# EAGLE board tarocco (EAGLE 7.3.0)
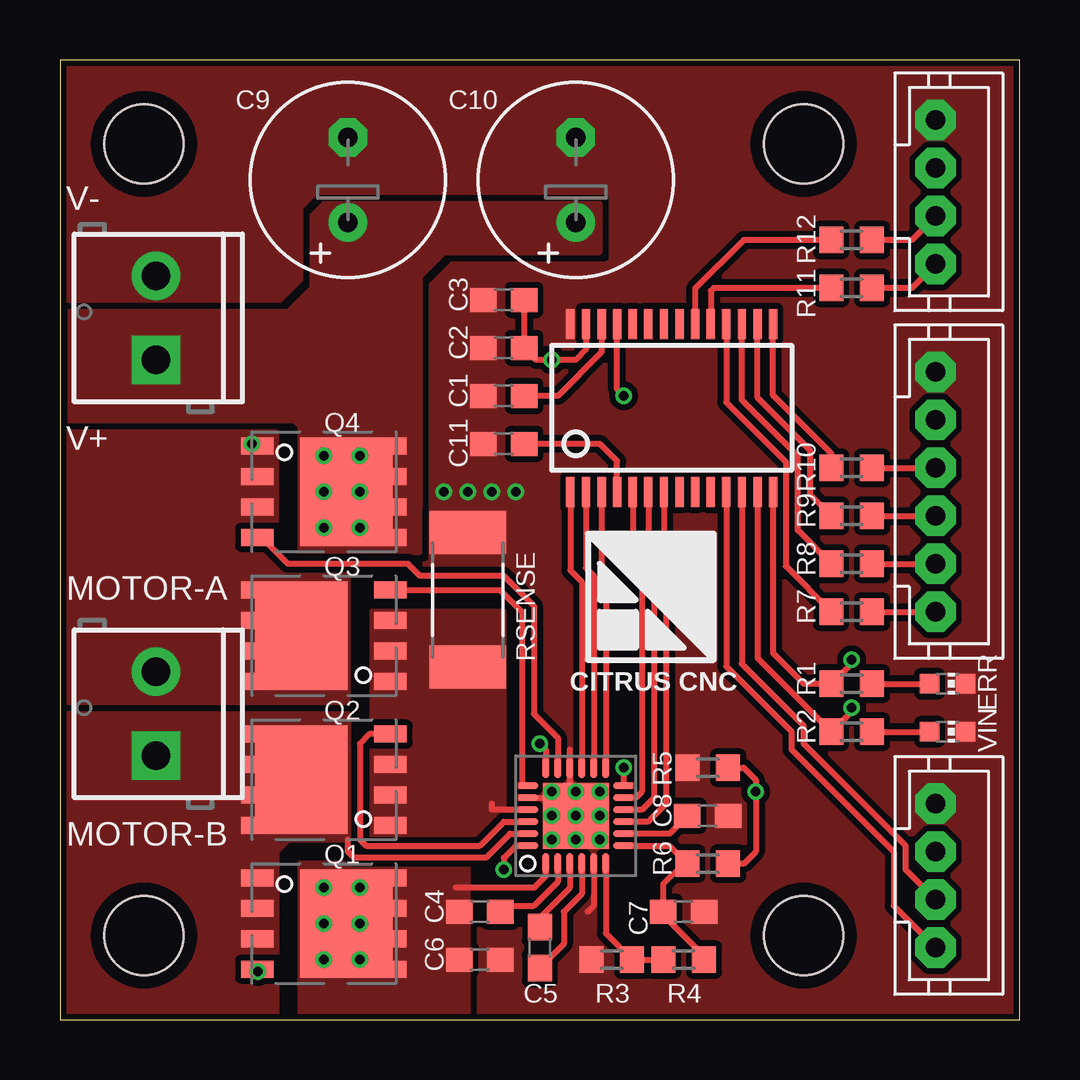
[diagram p0: board, top side]
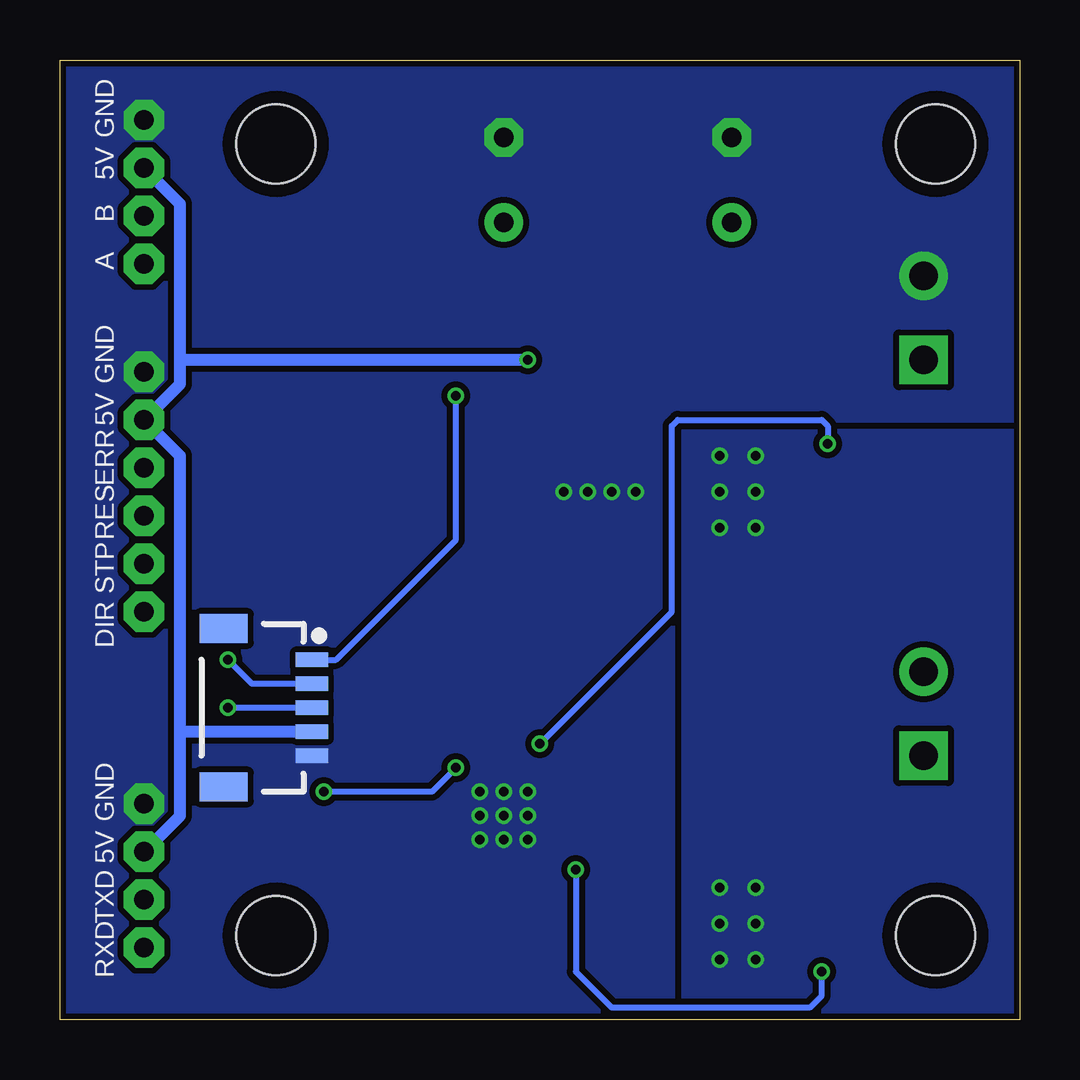
[diagram p1: board, bottom side, seen from below]

Size 40 x 40 mm. Coordinates in mm from the lower left corner, seen from the top.
Outline: 0,0 40,0 40,40 0,40 0,0
Copper layers (1*16): Top 0.035mm / dielectric 1.5mm / Bottom 0.035mm
Design rules "MF_Standard_2_Layer": minimum track width 5mil, minimum drill 12mil, track to track 5mil, track to pad 5mil, pad to pad 5mil, via to via 5mil, smd to smd 0mil, copper to edge 10mil, drill to drill 10mil, minimum pad ring 6mil, minimum via ring 6mil, stop-mask expansion 2mil, vias tented up to drill 25mil, thermal gap 10mil

## Footprints (pad centres in the part's own frame; a part is rotated, then mirrored left to right if it is on the bottom)
VQFN24 = smd 0.28 x 0.85: AVDD -1.25,-1.975; DVDD -0.75,-1.975; FAULT -0.25,-1.975; GH2 -1.25,1.975; GL1 1.25,1.975; GL2 -0.25,1.975; IDRIVE 1.25,-1.975; SENSE 0.25,-1.975; SH2 -0.75,1.975; SN 0.75,1.975; SO 0.75,-1.975; SP 0.25,1.975 | smd 0.85 x 0.28: CPH -1.975,0.25; CPL -1.975,-0.25; EN 1.975,-0.75; GH1 1.975,0.75; GND@1 1.975,0.25; GND@2 -1.975,-0.75; PH 1.975,-0.25; SH1 1.975,1.25; SLEEP 1.975,-1.25; VCP -1.975,0.75; VM -1.975,1.25; VREF -1.975,-1.25 | smd 2.75 x 2.75: GND@3 0,0
C0603 = smd 1.1 x 1: 1 -0.85,0; 2 0.85,0
E3,5-8 = drill 0.813 pad 1.6: + -1.778,0 | drill 0.813 pad 1.6 octagon: - 1.778,0
JST-PH6 = drill 0.813 pad 1.676 octagon: 1 5,0; 2 3,0; 3 1,0; 4 -1,0; 5 -3,0; 6 -5,0
JST-PH4 = drill 0.813 pad 1.676 octagon: 1 3,0; 2 1,0; 3 -1,0; 4 -3,0
CHIP-LED0603 = smd 0.8 x 0.8: A 0,-0.75; C 0,0.75
SSOP28 = smd 0.35 x 1.25: 1 -4.225,-3.5; 2 -3.575,-3.5; 3 -2.925,-3.5; 4 -2.275,-3.5; 5 -1.625,-3.5; 6 -0.975,-3.5; 7 -0.325,-3.5; 8 0.325,-3.5; 9 0.975,-3.5; 10 1.625,-3.5; 11 2.275,-3.5; 12 2.925,-3.5; 13 3.575,-3.5; 14 4.225,-3.5; 15 4.225,3.5; 16 3.575,3.5; 17 2.925,3.5; 18 2.275,3.5; 19 1.625,3.5; 20 0.975,3.5; 21 0.325,3.5; 22 -0.325,3.5; 23 -0.975,3.5; 24 -1.625,3.5; 25 -2.275,3.5; 26 -2.925,3.5; 27 -3.575,3.5; 28 -4.225,3.5
SCREWTERMINAL-3.5MM-2 = drill 1.2 pad 2.032 square: 1 0,0 | drill 1.2 pad 2.032: 2 3.5,0
1X05-1MM-RA = smd 0.6 x 1.35: 1 -2,0; 2 -1,0; 3 0,0; 4 1,0; 5 2,0 | smd 1.2 x 2: NC1 3.3,-3.675; NC2 -3.3,-3.675
SON5X6 = smd 0.59 x 0.71: DRAIN@1 -3.161,1.905; DRAIN@2 -3.161,0.635; DRAIN@3 -3.161,-0.635; DRAIN@4 -3.161,-1.905 | smd 3.85 x 4.52: DRAIN@5 -0.941,0 | smd 1.372 x 0.71: GATE 2.77,1.905; SOURCE@1 2.77,-1.905; SOURCE@2 2.77,-0.635; SOURCE@3 2.77,0.635
R0603 = smd 1 x 1.1: 1 -0.85,0; 2 0.85,0
R2512 = smd 1.8 x 3.2: 1 -2.8,0; 2 2.8,0
STAND-OFF = hole 3.302: 0,0

## Placement (x,y rotation side)
8701  DRV8701  [VQFN24]  21.5,8.5 90 top
C1  1u  [C0603]  18.5,26 180 top
C2  1u  [C0603]  18.5,28 180 top
C3  100n  [C0603]  18.5,30 180 top
C4  1u  [C0603]  17.5,4.5 0 top
C5  100n  [C0603]  20,3 270 top
C6  100n  [C0603]  17.5,2.5 0 top
C7  1u  [C0603]  26,4.5 0 top
C8  1u  [C0603]  27,8.5 0 top
C9  [E3,5-8]  12,35 90 top
C10  [E3,5-8]  21.5,35 90 top
C11  100n  [C0603]  18.5,24 180 top
CONTROL  [JST-PH6]  36.5,22 270 top
ENCODER  [JST-PH4]  36.5,34.5 270 top
ERR  [CHIP-LED0603]  37,14 270 top
IC1  CY8C4545PVI  [SSOP28]  25.5,25.5 0 top
MTR  M023.5MM  [SCREWTERMINAL-3.5MM-2]  4,11 90 top
PGRM  [1X05-1MM-RA]  29.5,13 270 bottom
PSU  M023.5MM  [SCREWTERMINAL-3.5MM-2]  4,27.5 90 top
Q1  NEXFET_SINGLECSD18537NQ5A  [SON5X6]  11,4 180 top
Q2  NEXFET_SINGLECSD18537NQ5A  [SON5X6]  11,10 0 top
Q3  NEXFET_SINGLECSD18537NQ5A  [SON5X6]  11,16 0 top
Q4  NEXFET_SINGLECSD18537NQ5A  [SON5X6]  11,22 180 top
R1  1k  [R0603]  33,14 180 top
R2  1k  [R0603]  33,12 180 top
R3  1k  [R0603]  23,2.5 180 top
R4  1k  [R0603]  26,2.5 0 top
R5  200k  [R0603]  27,10.5 0 top
R6  68k  [R0603]  27,6.5 0 top
R7  330  [R0603]  33,17 180 top
R8  330  [R0603]  33,19 180 top
R9  330  [R0603]  33,21 180 top
R10  330  [R0603]  33,23 180 top
R11  330  [R0603]  33,30.5 180 top
R12  330  [R0603]  33,32.5 180 top
RSENSE  0.005  [R2512]  17,17.5 270 top
SERIAL  [JST-PH4]  36.5,6 270 top
STANDOFF1  STAND-OFF  [STAND-OFF]  3.5,36.5 0 top
STANDOFF2  STAND-OFF  [STAND-OFF]  31,36.5 0 top
STANDOFF3  STAND-OFF  [STAND-OFF]  3.5,3.5 0 top
STANDOFF4  STAND-OFF  [STAND-OFF]  31,3.5 0 top
VIN  [CHIP-LED0603]  37,12 270 top

## Library data of the parts
8701 = drv8x
C1-C11 ERR R1-R12 RSENSE VIN = adafruit
CONTROL ENCODER SERIAL = jst-ph
IC1 = CY8C4200
MTR PGRM PSU = SparkFun-Connectors
Q1-Q4 = mosfet
STANDOFF1-STANDOFF4 = SparkFun-Electromechanical

## Nets
5V: C2.1 C3.1 CONTROL.5 ENCODER.3 IC1.27 PGRM.4 SERIAL.3
A: IC1.19 R11.2
B: IC1.20 R12.2
DIRECTION: IC1.18 R7.2
ENABLE: 8701.EN IC1.2
ERROR: IC1.15 R10.2
FAULT: 8701.FAULT IC1.7
GND: 8701.GND@1 8701.GND@2 8701.GND@3 8701.SN C1.2 C2.2 C3.2 C6.2 C7.2 C8.2 C9.- C10.- C11.2 CONTROL.6 ENCODER.4 ERR.C IC1.28 PGRM.5 PSU.2 R3.2 R5.1 RSENSE.1 SERIAL.4 VIN.C
ISENSE: 8701.SO IC1.5
N$1: 8701.GL1 Q3.GATE
N$2: 8701.SH1 MTR.2 Q3.DRAIN@1 Q3.DRAIN@2 Q3.DRAIN@3 Q3.DRAIN@4 Q3.DRAIN@5 Q4.SOURCE@1 Q4.SOURCE@2 Q4.SOURCE@3
N$3: 8701.SH2 MTR.1 Q1.SOURCE@1 Q1.SOURCE@2 Q1.SOURCE@3 Q2.DRAIN@1 Q2.DRAIN@2 Q2.DRAIN@3 Q2.DRAIN@4 Q2.DRAIN@5
N$4: 8701.GH2 Q1.GATE
N$5: 8701.SP Q2.SOURCE@1 Q2.SOURCE@2 Q2.SOURCE@3 Q3.SOURCE@1 Q3.SOURCE@2 Q3.SOURCE@3 RSENSE.2
N$6: 8701.GL2 Q2.GATE
N$7: 8701.GH1 Q4.GATE
N$8: ENCODER.1 R11.1
N$10: ENCODER.2 R12.1
N$11: 8701.VCP C4.2
N$12: 8701.CPL C5.2
N$13: 8701.CPH C5.1
N$14: CONTROL.1 R7.1
N$15: 8701.VREF R3.1 R4.1
N$16: 8701.AVDD C7.1 R4.2 R6.1
N$17: 8701.DVDD C8.1
N$18: CONTROL.2 R8.1
N$19: C1.1 IC1.26
N$20: CONTROL.3 R9.1
N$21: 8701.IDRIVE R5.2 R6.2
N$22: CONTROL.4 R10.1
N$23: 8701.VM C4.1 C6.1 C9.+ C10.+ PSU.1 Q1.DRAIN@1 Q1.DRAIN@2 Q1.DRAIN@3 Q1.DRAIN@4 Q1.DRAIN@5 Q4.DRAIN@1 Q4.DRAIN@2 Q4.DRAIN@3 Q4.DRAIN@4 Q4.DRAIN@5
N$24: ERR.A R1.1
N$25: R2.1 VIN.A
N$29: C11.1 IC1.4
N$33: IC1.8
N$34: IC1.9
N$35: IC1.10
N$46: IC1.21
N$47: IC1.22
N$48: IC1.23
N$49: IC1.24
OVC: 8701.SENSE IC1.6
PHASE: 8701.PH IC1.1
RESET: IC1.16 R9.2
RXD: IC1.11 SERIAL.1
SLEEP: 8701.SLEEP IC1.3
STEP: IC1.17 R8.2
SWDCLK: IC1.14 PGRM.2 R1.2
SWDIO: IC1.13 PGRM.3 R2.2
TXD: IC1.12 SERIAL.2
XRES: IC1.25 PGRM.1

## Tracks (layer width: path | path; a pad name or v marks a point on that pad's centre or on a via)
5V  (via drill 0.4)
  Top 0.25: IC1.27 21.93,27.93 21.5,27.5 v20.5,27.5 19.85,27.5 C2.1 C3.1
  Bottom 0.5: SERIAL.3 35,8.5 35,12 | 35,12 35,23.5 CONTROL.5 35,26.5 35,27.5 | 35,27.5 35,34 ENCODER.3 | v20.5,27.5 35,27.5 | PGRM.4 35,12
A
  Top 0.25: R11.2 27.25,30.5 27.12,30.38 IC1.19
B
  Top 0.25: R12.2 28.5,32.5 26.48,30.48 IC1.20
DIRECTION
  Top 0.25: IC1.18 27.77,25.73 30.25,23.25 30.25,18.9 R7.2
ENABLE
  Top 0.25: IC1.2 21.93,18.82 22.25,18.5 8701.EN
ERROR
  Top 0.25: IC1.15 29.73,26.02 32.15,23.6 R10.2
FAULT
  Top 0.25: IC1.7 25.18,19.07 25.25,19 25.25,9 24.5,8.25 8701.FAULT
GND  (via drill 0.4)
  Top 0.25: 21,9 21,9.5 21.25,9.25 8701.GND@1 | 22,8 21.25,8.75 21.25,11.25 | 8701.SN 20.25,9.25 v20.5,9.5 | 8701.GND@2 22.25,4.75 22,4.5
  other vias: 21.5,9.5 22.5,9.5 20.5,8.5 20.5,7.5 22.5,8.5 21.5,7.5 22.5,7.5 21.5,8.5 16,22 17,22 18,22 19,22
  pour Bottom (isolate 0.25, rank 6, no thermals): 0,0 40,0 40,40 0,40
  pour Top (isolate 0.25, rank 6, no thermals): 0,0 40,0 40,40 0,40
ISENSE
  Top 0.25: IC1.5 23.88,18.88 24.25,18.5 24.25,9.5 24,9.25 8701.SO
N$1
  Top 0.25: Q3.GATE 18.34,17.91 19.25,17 19.25,9.75 8701.GL1
N$2  (via drill 0.4)
  Top 0.25: v20,11.5 20.25,11.25 8701.SH1 | Q4.SOURCE@1 8.13,24 v8,24 8.1,23.91 Q4.SOURCE@1
  Bottom 0.25: v8,24 8,24.75 8.25,25 14.25,25 14.5,24.75 14.5,17 v20,11.5
  pour Top (isolate 0.25, rank 2, no thermals): 0,13.25 12,13.25 12,18.5 9.5,18.5 9,19 9,24.5 0,24.5
N$3
  Top 0.25: 12,7.5 12,7 12.25,6.75 17.75,6.75 18.75,7.75 8701.SH2
  pour Top (isolate 0.25, no thermals): 0,12.75 12,12.75 12,7.5 9.5,7.5 9,7 9,0 0,0
N$4  (via drill 0.4)
  Top 0.25: Q1.GATE 8.23,2.02 v8.25,2 | v18.5,6.25 18.5,6.75 19,7.25 8701.GH2
  Bottom 0.25: v18.5,6.25 18.5,2 17,0.5 8.75,0.5 8.25,1 v8.25,2
N$5
  Top 0.25: 8701.SP 18,8.75 18,9
  pour Top (isolate 0.25, no thermals): 13,7.5 18.5,7.5 18.5,17 13,17
N$6
  Top 0.25: Q2.GATE 12.9,11.9 12.5,11.5 12.5,7.5 12.75,7.25 17.5,7.25 18.5,8.25 8701.GL2
N$7
  Top 0.25: Q4.GATE 8.4,20.09 9.5,19 14.5,19 15,18.5 18.5,18.5 19.75,17.25 19.75,12.75 20.75,11.75 8701.GH1
N$8
  Top 0.25: ENCODER.1 35.5,30.5 R11.1
N$10
  Top 0.25: ENCODER.2 35.5,32.5 R12.1
N$11
  Top 0.25: C4.2 18.6,4.75 19.75,4.75 20.75,5.75 8701.VCP
N$12
  Top 0.25: C5.2 21,3.15 21,4.5 21.75,5.25 8701.CPL
N$13
  Top 0.25: 20,4 C5.1 20,4.25 21.25,5.5 8701.CPH
N$14
  Top 0.25: R7.1 CONTROL.1
N$15
  Top 0.25: R4.1 R3.1 22.75,3.6 8701.VREF
N$16
  Top 0.25: R4.2 26.85,2.65 25.15,4.35 C7.1 25.15,5.65 26,6.5 R6.1 25.4,7.25 8701.AVDD
N$17
  Top 0.25: C8.1 25.4,7.75 8701.DVDD
N$18
  Top 0.25: R8.1 CONTROL.2
N$19
  Top 0.25: IC1.26 22.57,27.82 20.75,26 C1.1
N$20
  Top 0.25: R9.1 CONTROL.3
N$21  (via drill 0.4)
  Top 0.25: 8701.IDRIVE 23.5,9.75 v23.5,10.5 | R5.2 28.5,10.5 29,10 v29,9.5 29,7 28.5,6.5 R6.2
  Bottom 0.25: v23.5,10.5 24.5,9.5 v29,9.5
N$22
  Top 0.25: R10.1 CONTROL.4
N$23  (via drill 0.4)
  Top 0.25: 16.5,5.5 19.75,5.5 20.25,6 8701.VM
  other vias: 11,5.5 11,4 11,2.5 12.5,2.5 12.5,4 12.5,5.5 11,23.5 11,22 11,20.5 12.5,23.5 12.5,22 12.5,20.5
  pour Top (isolate 0.25, no thermals): 17,6.5 10,6.5 10,0 17,0
  pour Top (isolate 0.3, no thermals): 0,29.5 0,25 9.75,25 10,24.75 10,19.5 15,19.5 15,31 16,32 22.5,32 22.5,34 11,34 10.5,33.5 10.5,30.5 9.5,29.5
  pour Bottom (isolate 0.25, no thermals): 0,24.5 14,24.5 14,0 0,0
N$24
  Top 0.25: R1.1 ERR.A
N$25
  Top 0.25: R2.1 VIN.A
N$29
  Top 0.25: IC1.4 23.23,23.27 22.5,24 C11.1
OVC
  Top 0.25: IC1.6 24.52,18.98 24.75,18.75 24.75,9.25 24.25,8.75 8701.SENSE
PHASE
  Top 0.25: IC1.1 21.27,18.73 21.75,18.25 8701.PH
RESET
  Top 0.25: IC1.16 29.07,25.93 31.25,23.75 31.25,21.9 R9.2
RXD
  Top 0.25: IC1.11 27.77,14.72 30.5,12 30.5,11.25 34.75,7 34.75,4.75 SERIAL.1
SLEEP
  Top 0.25: IC1.3 22.57,18.93 22.75,18.75 8701.SLEEP
STEP
  Top 0.25: R8.2 30.75,20.4 30.75,23.5 28.43,25.82 IC1.17
SWDCLK  (via drill 0.4)
  Top 0.25: IC1.14 29.73,15.28 31,14 R1.2 33,14.85 v33,15
  Bottom 0.25: PGRM.2 32,14 v33,15
SWDIO  (via drill 0.4)
  Top 0.25: IC1.13 29.07,15.07 R2.2 33,12.85 v33,13
  Bottom 0.25: PGRM.3 v33,13
TXD
  Top 0.25: IC1.12 28.43,14.82 31,12.25 31,11.5 35.25,7.25 35.25,6.25 SERIAL.2
XRES  (via drill 0.4)
  Top 0.25: v23.5,26 23.23,26.27 IC1.25
  Bottom 0.25: v23.5,26 23.5,20 28.5,15 PGRM.1

## Text on the board
tNames: V- | V+ | MOTOR-A | CITRUS CNC | MOTOR-B
bNames: GND | 5V | B | A | GND | 5V | ERR | RES | STP | DIR | GND | 5V | TXD | RXD
Measures: 3.5 | 27.5 | 40 | 33 | 3.5 | 40 | All dimensions in mm
Document: GND | VLOGIC | B | A | V- | V+ | GND | VLOGIC | ERROR | RESET | STEP | DIRECTION | MOTOR-A | MOTOR-B | GND | VLOGIC | TXD | RXD